# Altium PCB PS3_CMOD_panel.PcbDoc
Units mm, origin at the board's own origin, x right, y up, seen from the top; angles counter-clockwise.
Board outline 88 x 84 mm, 2 copper layers (Top Layer, Bottom Layer), stack 0.971 mm thick; 4 components, 0 nets, 4 pads, 0 vias.
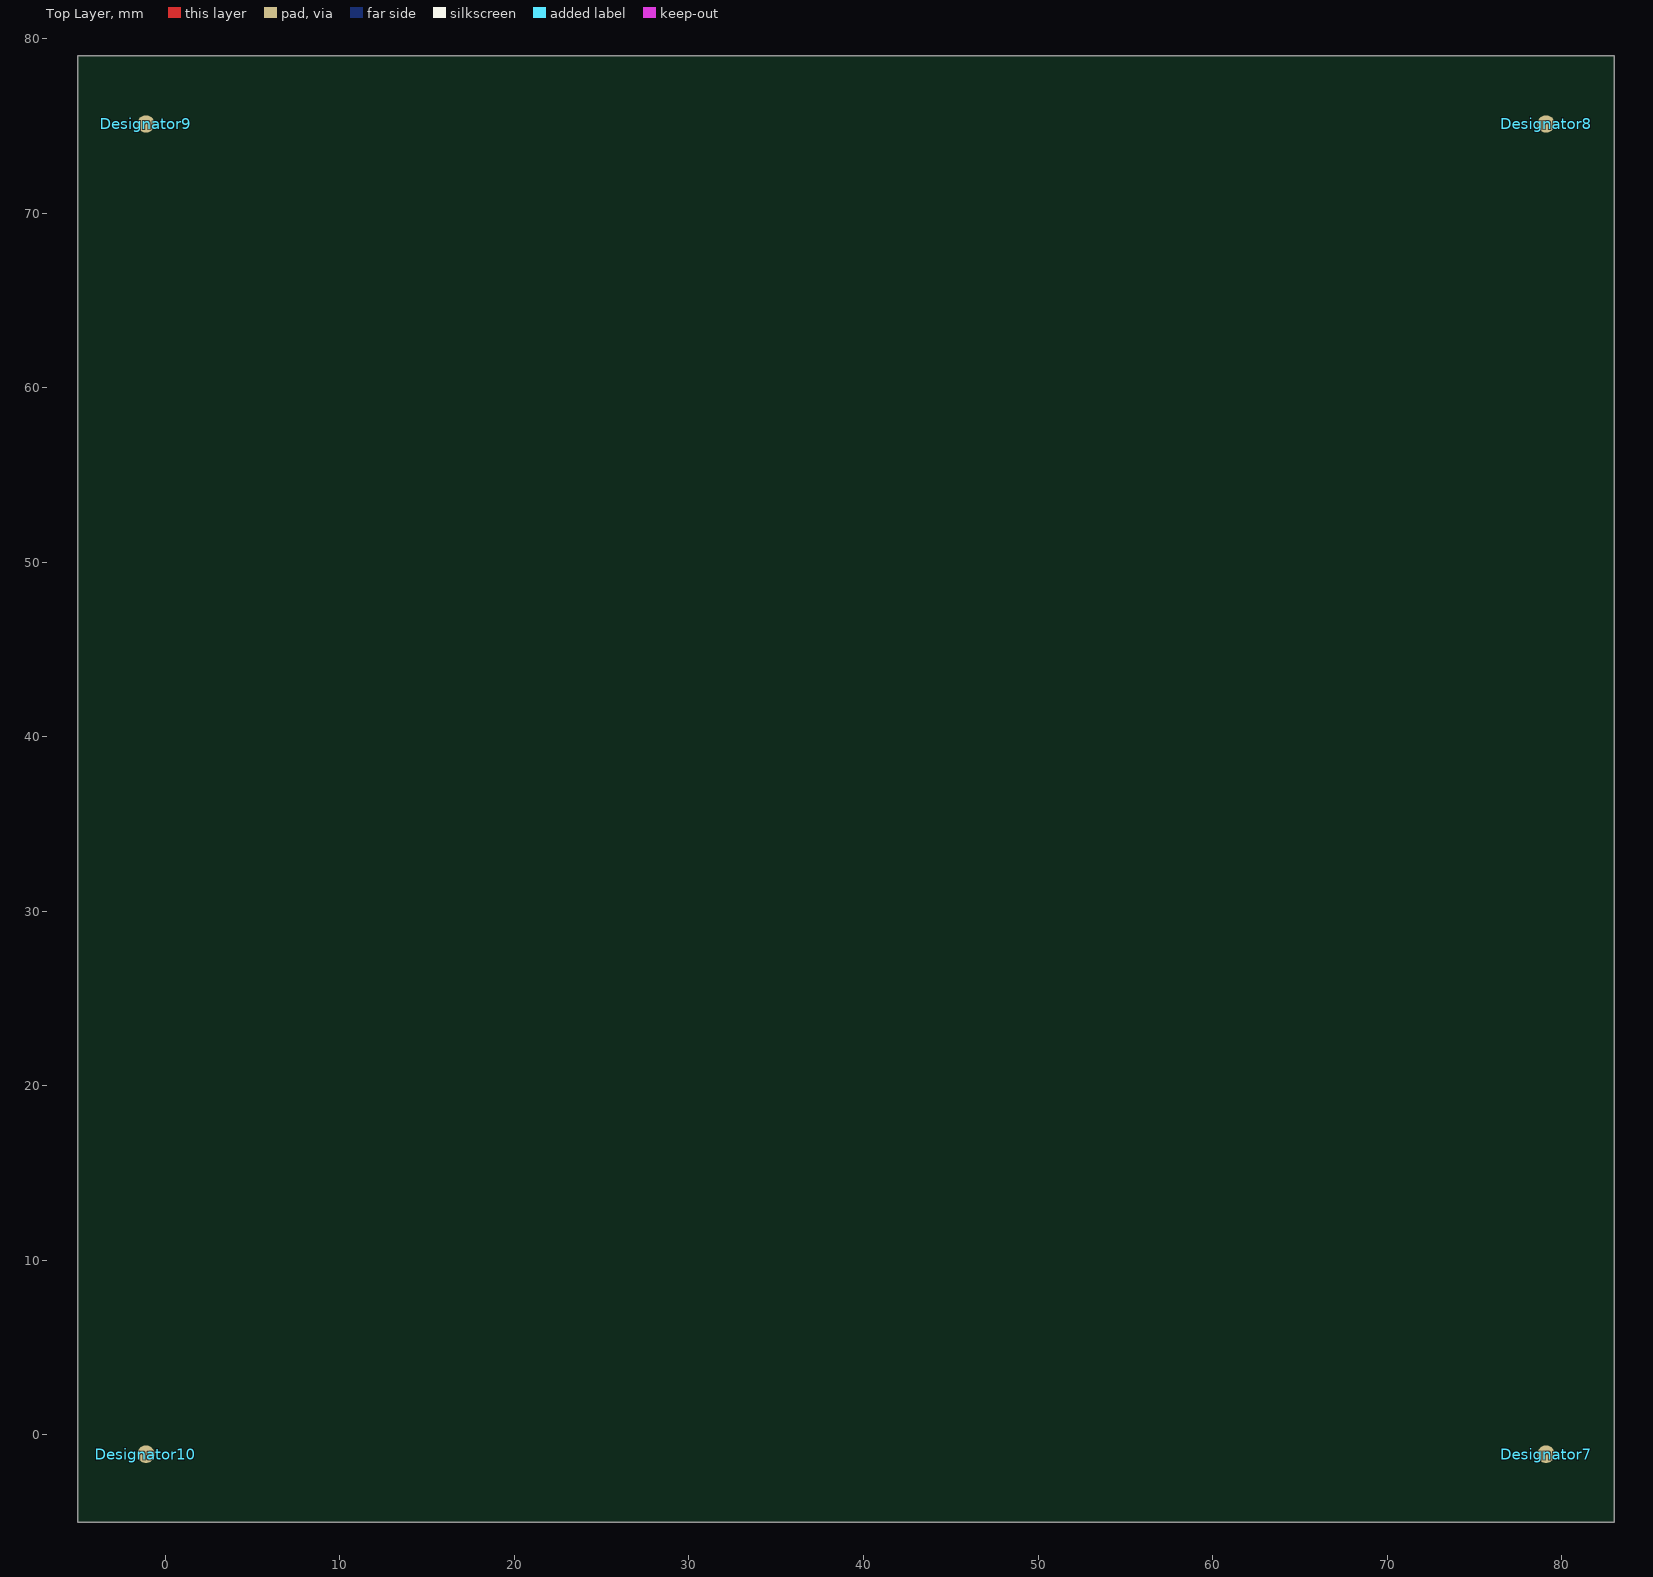
[diagram p0: Top Layer view]
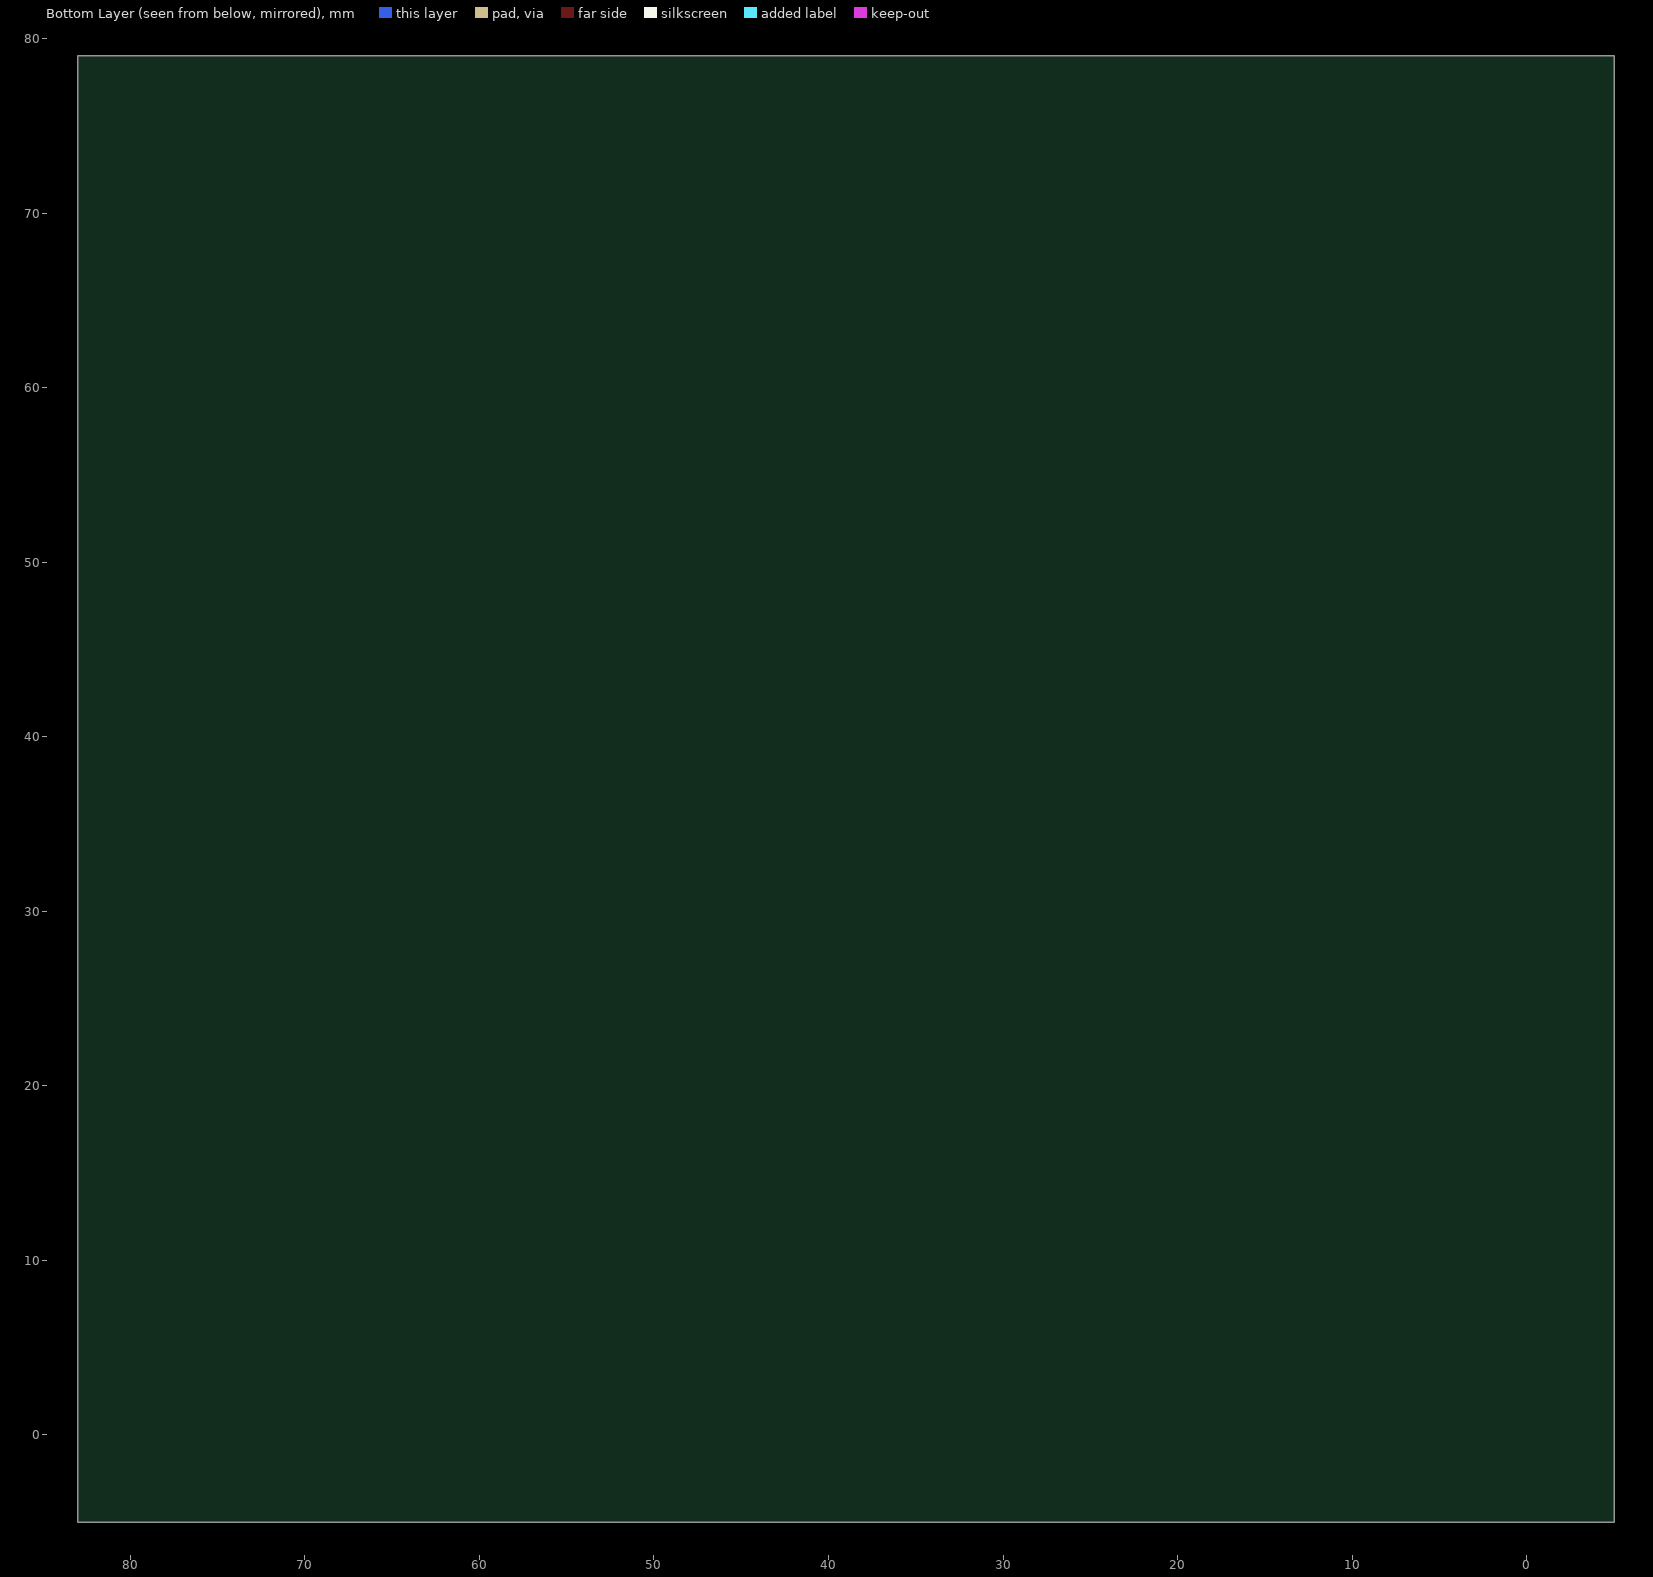
[diagram p1: Bottom Layer view, seen from below]

## Layer stack, top to bottom
Top Solder: solder mask 0.0102, Solder Resist, Dk 3.5
Top Layer: signal copper 0.0356
Dielectric 1: dielectric 0.9, FR-4, Dk 4.8
Bottom Layer: signal copper 0.0356
Bottom Solder: solder mask 0.0102, Solder Resist, Dk 3.5

## Board outline
-5,79 83,79 83,-5 -5,-5

## Design rules (kind name [scope] priority, off if disabled: settings)
Clearance [All] p1: gap=0.254 ignorepadtopadclearanceinfootprint=FALSE except(0: Arc-Hole Track-Hole SMDPad-Hole THPad-Hole Via-Hole Fill-Hole Poly-Hole Region-Hole Text-Hole)
PolygonConnect [All] p1: connectstyle=Relief reliefconductorwidth=0.254 reliefentries=4 polygonreliefangle="90 Angle" airgapwidth=0.254
RoutingVias [All] p1: holewidth=0.711 width=1.27 viastyle="Through Hole" minholewidth=0.711 minwidth=1.27 maxholewidth=0.711 maxwidth=1.27
SolderMaskExpansion [All] p1: expansion=0.102 istentingtop=FALSE
Width [All] p1: maxlimit=0.254 minlimit=0.254 preferedwidth=0.254
30 further rules are at their usual default settings.

## Components (designator, comment, footprint, x,y, rotation, side; value= is the part's Value field where it differs from the comment)
Designator7 "Comment" "JLC FIDUTIAL" 79.1,-1.1 r0 top locked
Designator8 "Comment" "JLC FIDUTIAL" 79.1,75.1 r0 top locked
Designator9 "Comment" "JLC FIDUTIAL" -1.1,75.1 r0 top locked
Designator10 "Comment" "JLC FIDUTIAL" -1.1,-1.1 r0 top locked

## Footprints (in the part's own frame and the unit in brackets; to place one, negate y for a bottom-side part, rotate by r counter-clockwise, add the part's x,y. Pads: shape width x height; smd on the part's side, far side on the other; paste and mask are expansions set on the pad)
"JLC FIDUTIAL" [mm]
  round 1 smd paste-2539.97 mask+0.5: FID1(0,0)

## Nets (pads, with @x,y where several pads share a name; then routed paths per layer and width w, separated by ;. In a path a pad name is that pad's centre, name@x,y a point inside that pad or via, vN(x,y) a via of type N, cw(c..) or ccw(c..) an arc to the next point about the centre after c; other vN are vias at no path point)
pads on no net: Designator7.FID1 Designator8.FID1 Designator9.FID1 Designator10.FID1

## Silkscreen, mask and mechanical layers (free items; w line width, h text height)
Route Tool Path:
  text "ROUTE TOOL PATH" at -47,-21 h8
V Cut:
  lines w0.2: -10,0 90,0 ; -10,13.2 90,13.2 ; -10,15.2 90,15.2 ; -10,28.4 90,28.4 ; -10,30.4 90,30.4 ; -10,43.6 90,43.6 ; -10,45.6 90,45.6 ; -10,58.8 90,58.8 ; -10,60.8 90,60.8 ; -10,74 90,74 ; 0,-10 0,85 ; 13,-10 13,85 ; 26,-10 26,85 ; 39,-10 39,85 ; 52,-10 52,85 ; 65,-10 65,85 ; 78,-10 78,85 ; 26,83 26,83 ; 52,82 52,82
  text "V-CUT" at -47,-9 h8

## Panel: embedded boards
"Dualshock-3-type-C_pcb.PcbDoc" at 0,0, 5 rows x 6 columns, spacing 15.2 x 13, rotation 0